# EAGLE board nbedmbed_minipro (EAGLE 7.1.0)
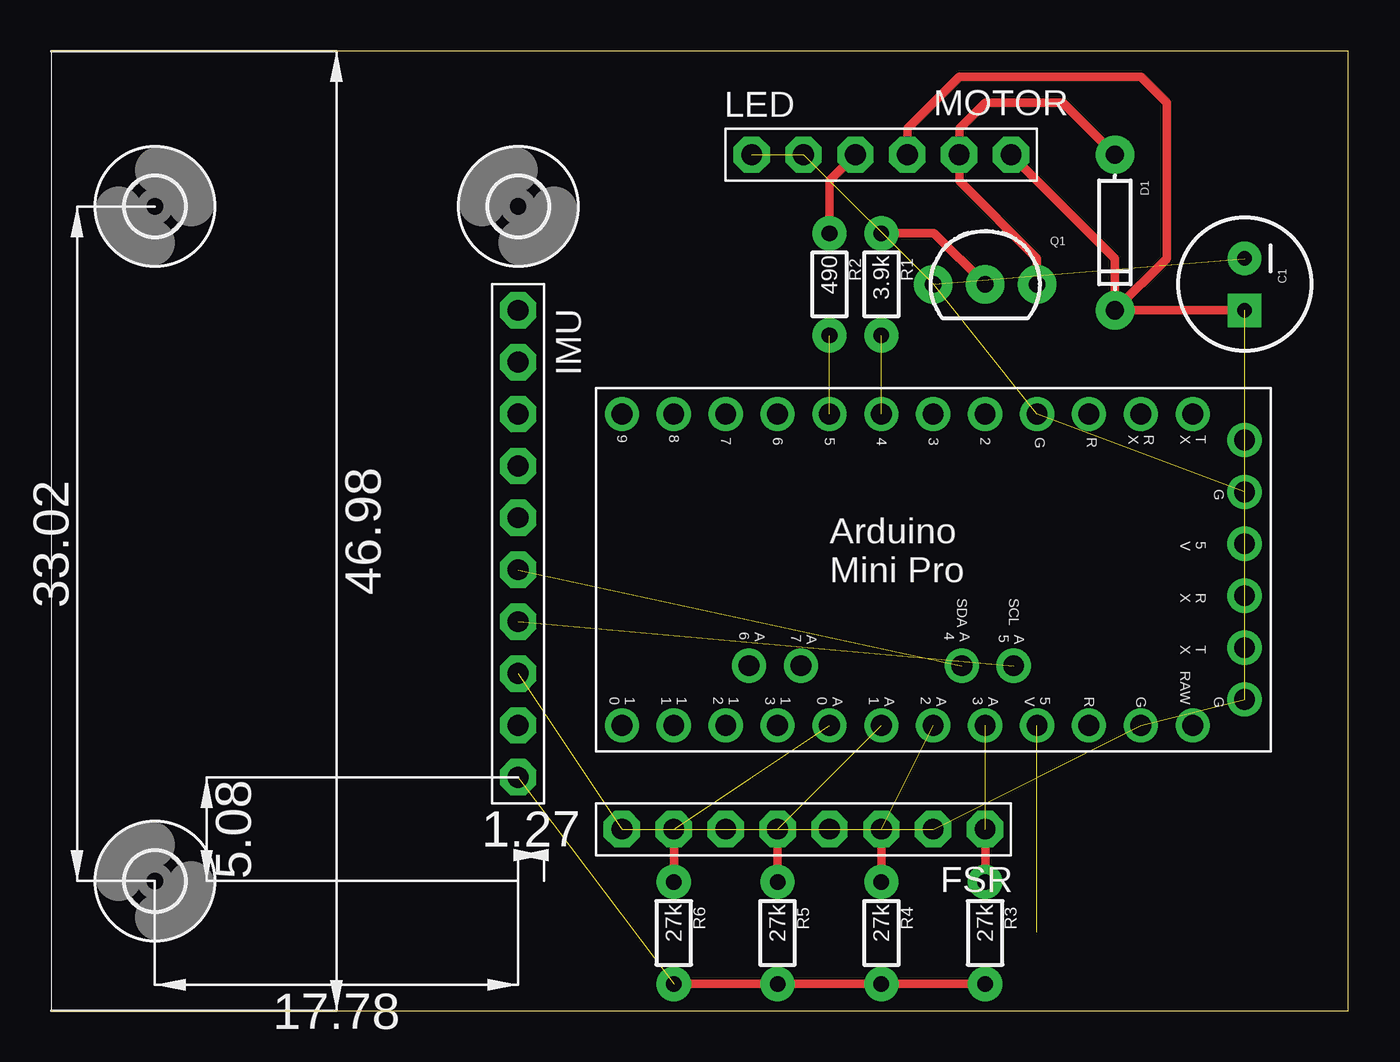
[diagram p0: board, top side]
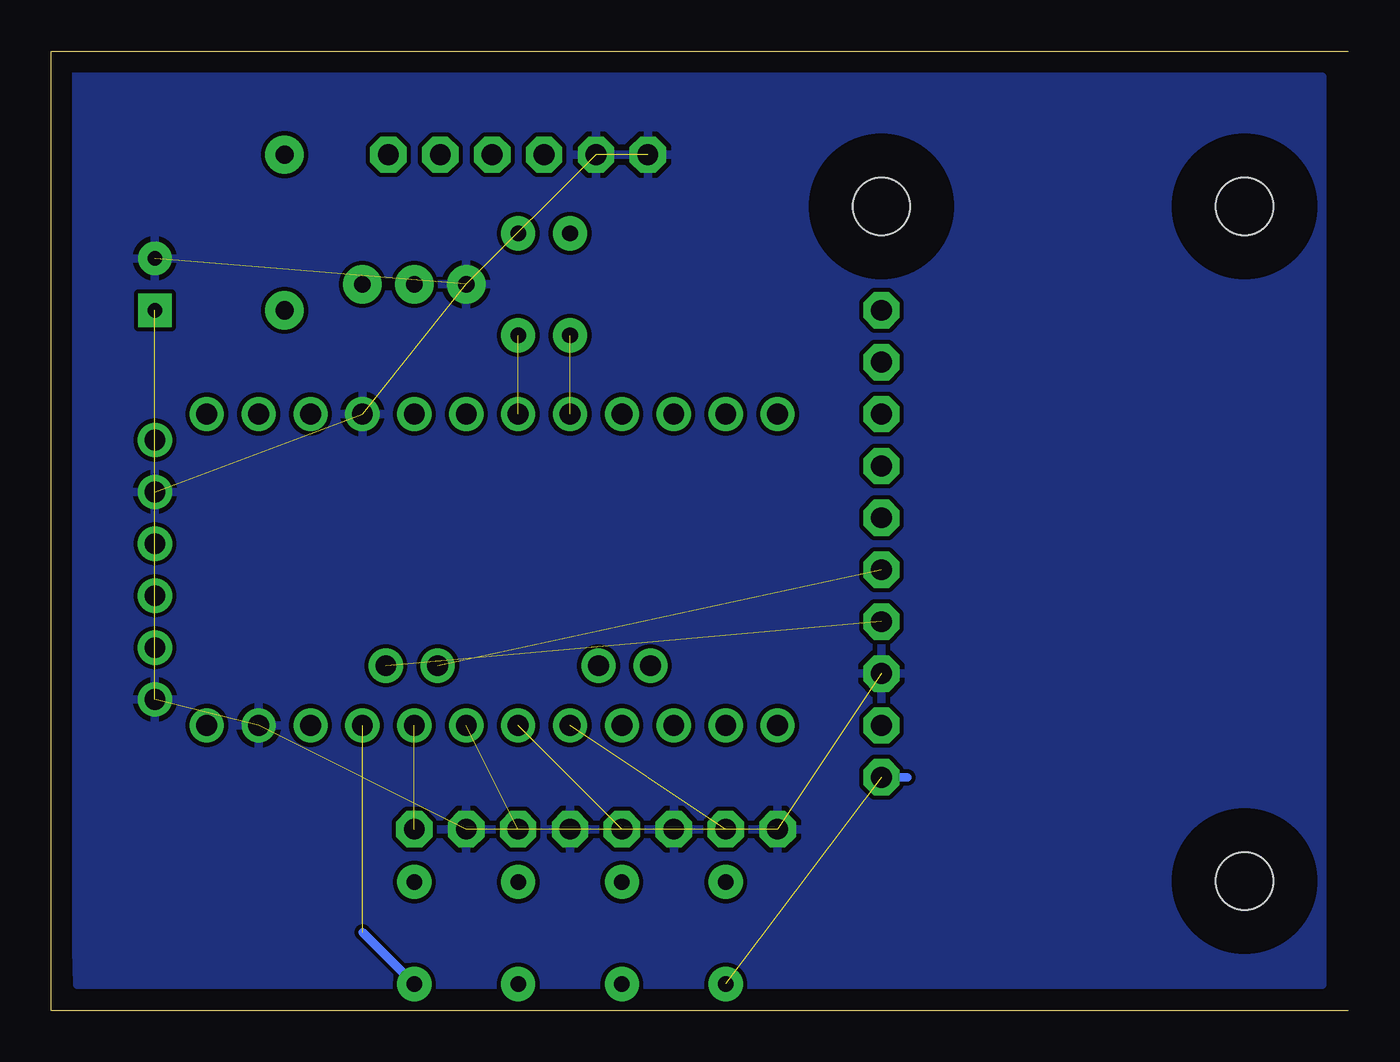
[diagram p1: board, bottom side, seen from below]

Size 63.5 x 46.98 mm. Coordinates in mm from the lower left corner, seen from the top.
Outline: 0,0 63.5,0 63.5,46.98 0,46.98
Copper layers (1*16): Top 0.035mm / dielectric 1.5mm / Bottom 0.035mm
Design rules "default": minimum track width 10mil, minimum drill 24mil, track to track 8mil, track to pad 8mil, pad to pad 8mil, via to via 8mil, smd to smd 8mil, copper to edge 40mil, drill to drill 8mil, minimum pad ring 10mil, minimum via ring 8mil, stop-mask expansion 4mil, vias tented up to drill 0mil, thermal gap 10mil

## Footprints (pad centres in the part's own frame; a part is rotated, then mirrored left to right if it is on the bottom)
CPOL-RADIAL-100UF-25V = drill 0.7 pad 1.651 square: 1 1.27,0 | drill 0.7 pad 1.651: 2 -1.27,0
DIODE-1N4148 = drill 0.9 pad 1.88: A -3.81,0; C 3.81,0
1X08-BIG = drill 1.016 pad 1.778 octagon: 1 -8.89,0; 2 -6.35,0; 3 -3.81,0; 4 -1.27,0; 5 1.27,0; 6 3.81,0; 7 6.35,0; 8 8.89,0
2,8 = hole 2.8: 0,0
1X10-BIG = drill 1.016 pad 1.778 octagon: 1 -11.43,0; 2 -8.89,0; 3 -6.35,0; 4 -3.81,0; 5 -1.27,0; 6 1.27,0; 7 3.81,0; 8 6.35,0; 9 8.89,0; 10 11.43,0
1X06-BIG = drill 1.016 pad 1.778 octagon: 1 -6.35,0; 2 -3.81,0; 3 -1.27,0; 4 1.27,0; 5 3.81,0; 6 6.35,0
ARDUINO_MINI_PRO = drill 1.016 pad 1.676: 2 19.05,16.51; 3 16.51,16.51; 4 13.97,16.51; 5 11.43,16.51; 5V 21.59,1.27; 5V. 31.75,10.16; 6 8.89,16.51; 7 6.35,16.51; 8 3.81,16.51; 9 1.27,16.51; 9V 29.21,1.27; 10 1.27,1.27; 11 3.81,1.27; 12 6.35,1.27; 13 8.89,1.27; ..GND 31.75,2.54; .GND 31.75,12.7; A0 11.43,1.27; A1 13.97,1.27; A2 16.51,1.27; A3 19.05,1.27; A4 17.907,4.191; A5 20.447,4.191; A6 7.493,4.191; A7 10.033,4.191; GND 21.59,16.51; GND.. 26.67,1.27; IO7 31.75,15.24; R 24.13,1.27; R. 24.13,16.51; RX 26.67,16.51; RX. 31.75,7.62; TX 29.21,16.51; TX. 31.75,5.08
TO-92-AMMO = drill 0.813 pad 1.88: 1 -2.54,0; 2 0,0; 3 2.54,0
1/6W-RES = drill 0.762 pad 1.676: 1 -2.5,0; 2 2.5,0

## Placement (x,y rotation side)
C1  [CPOL-RADIAL-100UF-25V]  58.42,35.56 270 top
D1  [DIODE-1N4148]  52.07,38.1 270 top
FSR  [1X08-BIG]  36.83,8.89 180 top
H1  MOUNT-HOLE2.8  [2,8]  22.86,39.37 90 top
H2  MOUNT-HOLE2.8  [2,8]  5.08,6.35 90 top
H3  MOUNT-HOLE2.8  [2,8]  5.08,39.37 0 top
IMU  9D0F  [1X10-BIG]  22.86,22.86 270 top
LED  MOTOR  [1X06-BIG]  40.64,41.91 0 top
PCB2  ARDUINO_MINI_PRO  [ARDUINO_MINI_PRO]  26.67,12.7 0 top
Q1  [TO-92-AMMO]  45.72,35.56 0 top
R1  3.9k  [1/6W-RES]  40.64,35.56 270 top
R2  490  [1/6W-RES]  38.1,35.56 270 top
R3  27k  [1/6W-RES]  45.72,3.81 270 top
R4  27k  [1/6W-RES]  40.64,3.81 270 top
R5  27k  [1/6W-RES]  35.56,3.81 270 top
R6  27k  [1/6W-RES]  30.48,3.81 270 top

## Library data of the parts
C1 = SparkFun-Capacitors
D1 Q1 = SparkFun-DiscreteSemi
FSR IMU LED = adafruit
H1-H3 = holes
PCB2 = IDD
R1-R6 = SparkFun-Resistors

## Nets
FSR/IMU_5V: IMU.10 PCB2.5V R3.2 R4.2 R5.2 R6.2
GND: C1.2 FSR.2 FSR.4 FSR.6 FSR.8 IMU.8 LED.1 LED.2 PCB2...GND PCB2..GND PCB2.GND PCB2.GND.. Q1.1
MOTOR/LED_5V: C1.1 D1.C LED.4 LED.6 PCB2.5V.
N$1: PCB2.4 R1.2
N$2: PCB2.5 R2.2
N$3: Q1.2 R1.1
N$4: LED.3 R2.1
N$5: FSR.1 PCB2.A3 R3.1
N$6: FSR.3 PCB2.A2 R4.1
N$7: D1.A LED.5 Q1.3
N$8: FSR.5 PCB2.A1 R5.1
N$9: FSR.7 PCB2.A0 R6.1
N$10: IMU.6 PCB2.A4
N$11: IMU.7 PCB2.A5

## Tracks (layer width: path | path; a pad name or v marks a point on that pad's centre or on a via)
FSR/IMU_5V  (2 unrouted)
  Top 0.406: R6.2 R5.2 R4.2 R3.2
  Bottom 0.406: 48.26,3.85 R3.2 | IMU.10 21.59,11.43
GND  (12 unrouted)
  pour Bottom: 1.27,1.27 1.27,45.72 63.5,45.72 62.23,1.27
MOTOR/LED_5V  (1 unrouted)
  Top 0.406: LED.6 52.07,36.83 D1.C | LED.4 41.91,43.18 44.45,45.72 53.34,45.72 54.61,44.45 54.61,36.83 D1.C | C1.1 D1.C
N$1  (1 unrouted)
N$2  (1 unrouted)
N$3
  Top 0.406: R1.1 43.22,38.06 Q1.2
N$4
  Top 0.406: R2.1 38.1,40.64 LED.3
N$5  (1 unrouted)
  Top 0.406: FSR.1 R3.1
N$6  (1 unrouted)
  Top 0.406: FSR.3 R4.1
N$7
  Top 0.406: Q1.3 48.26,36.83 44.45,40.64 LED.5 44.45,43.18 45.72,44.45 49.53,44.45 D1.A
N$8  (1 unrouted)
  Top 0.406: FSR.5 R5.1
N$9  (1 unrouted)
  Top 0.406: FSR.7 R6.1
N$10  (1 unrouted)
N$11  (1 unrouted)